# Altium PCB Standalone.PcbDoc
Units mm, origin at the board's own origin, x right, y up, seen from the top; angles counter-clockwise.
Board outline 50 x 50 mm, 2 copper layers (Top Layer, Bottom Layer), stack 1.671 mm thick; 24 components, 27 nets, 89 pads, 12 vias.
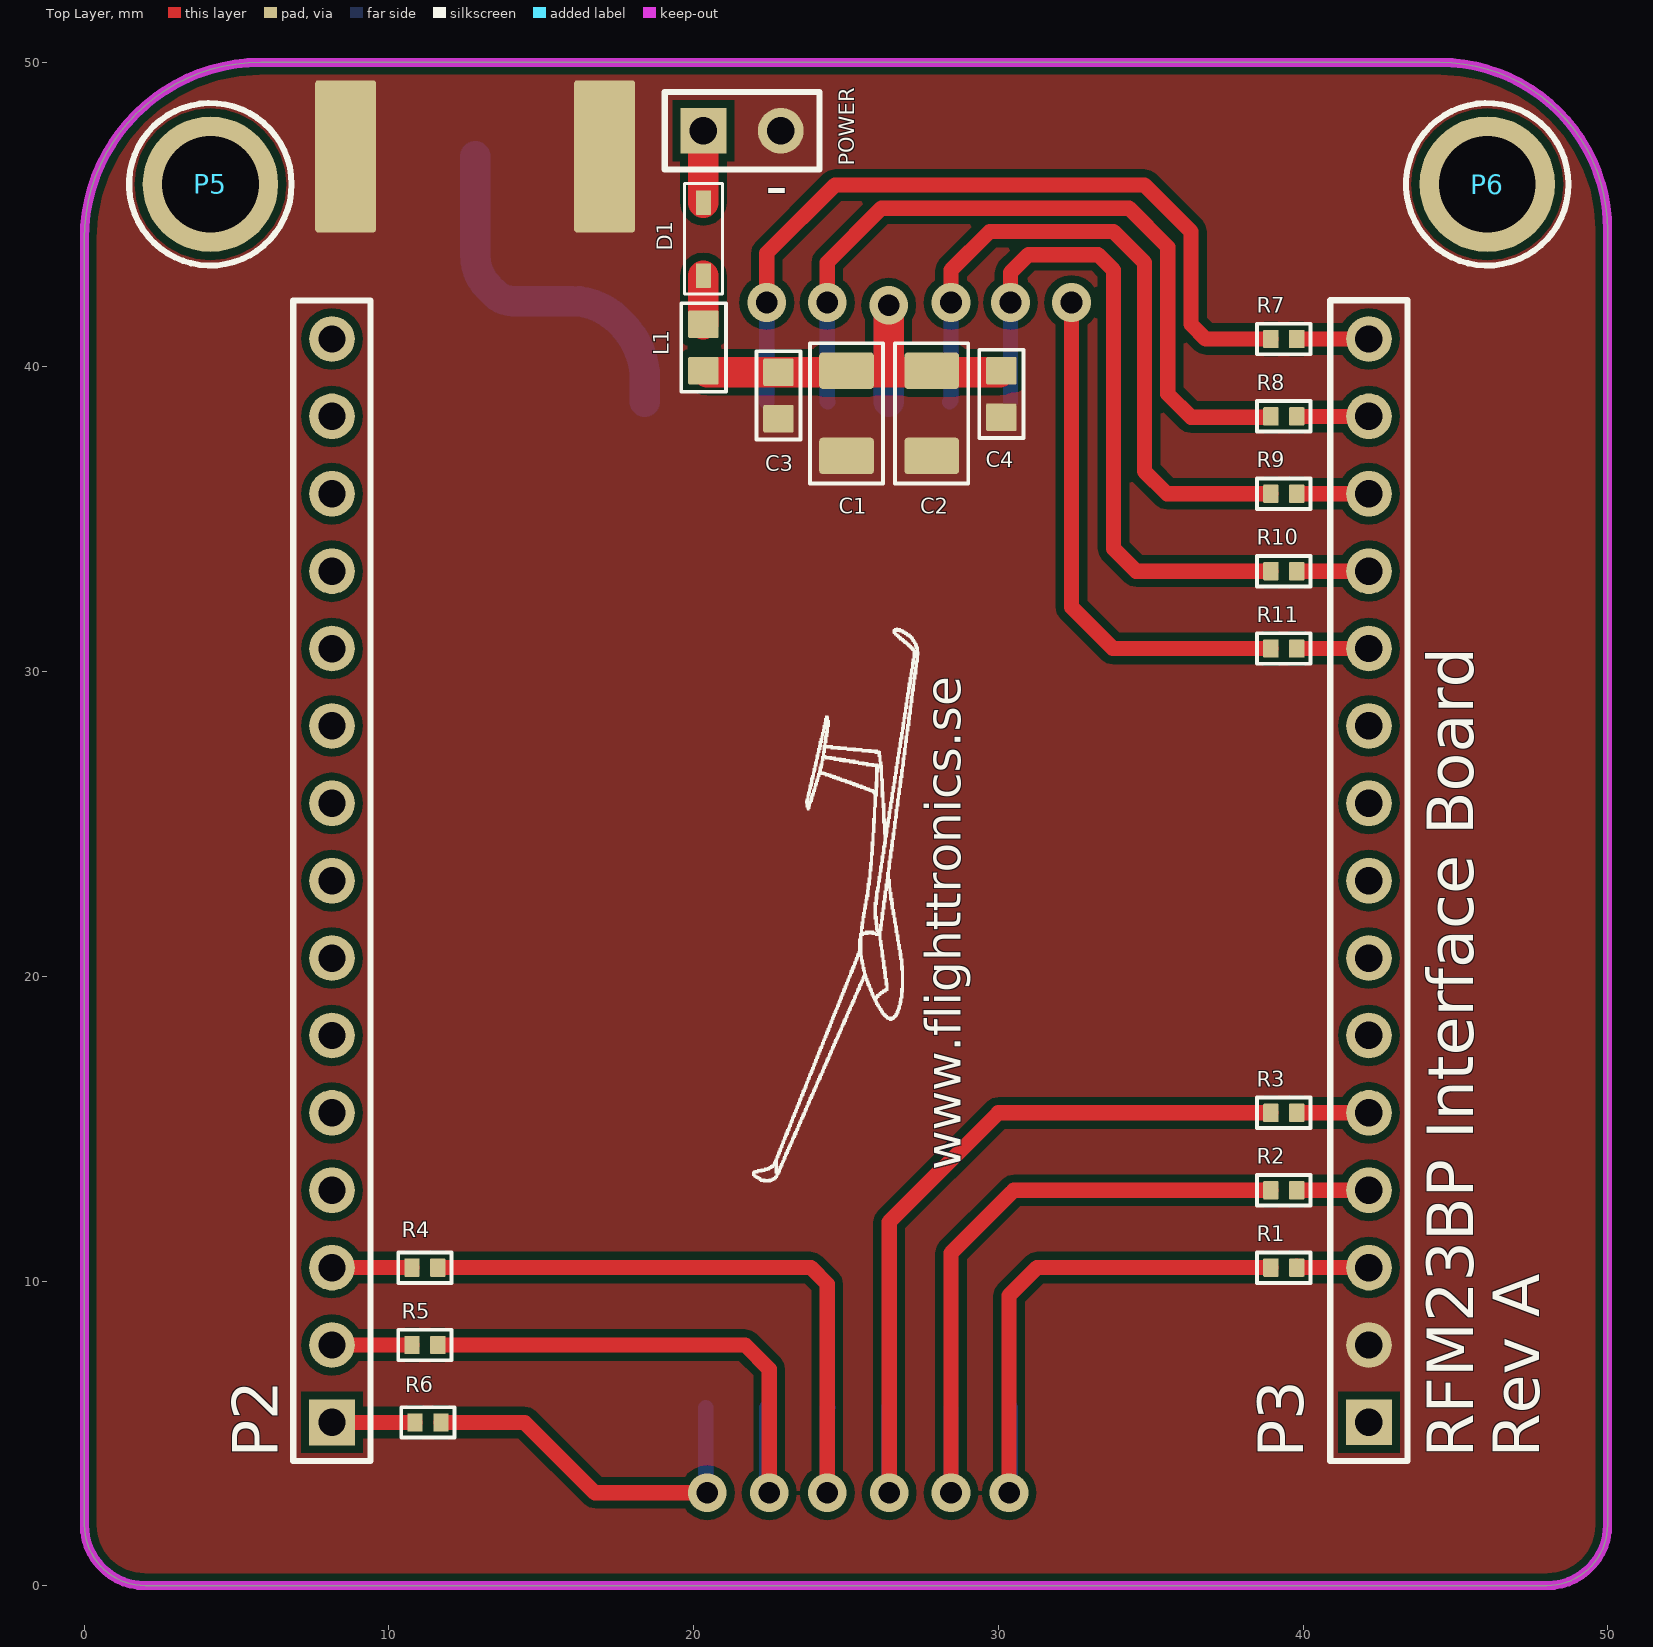
[diagram p0: Top Layer view]
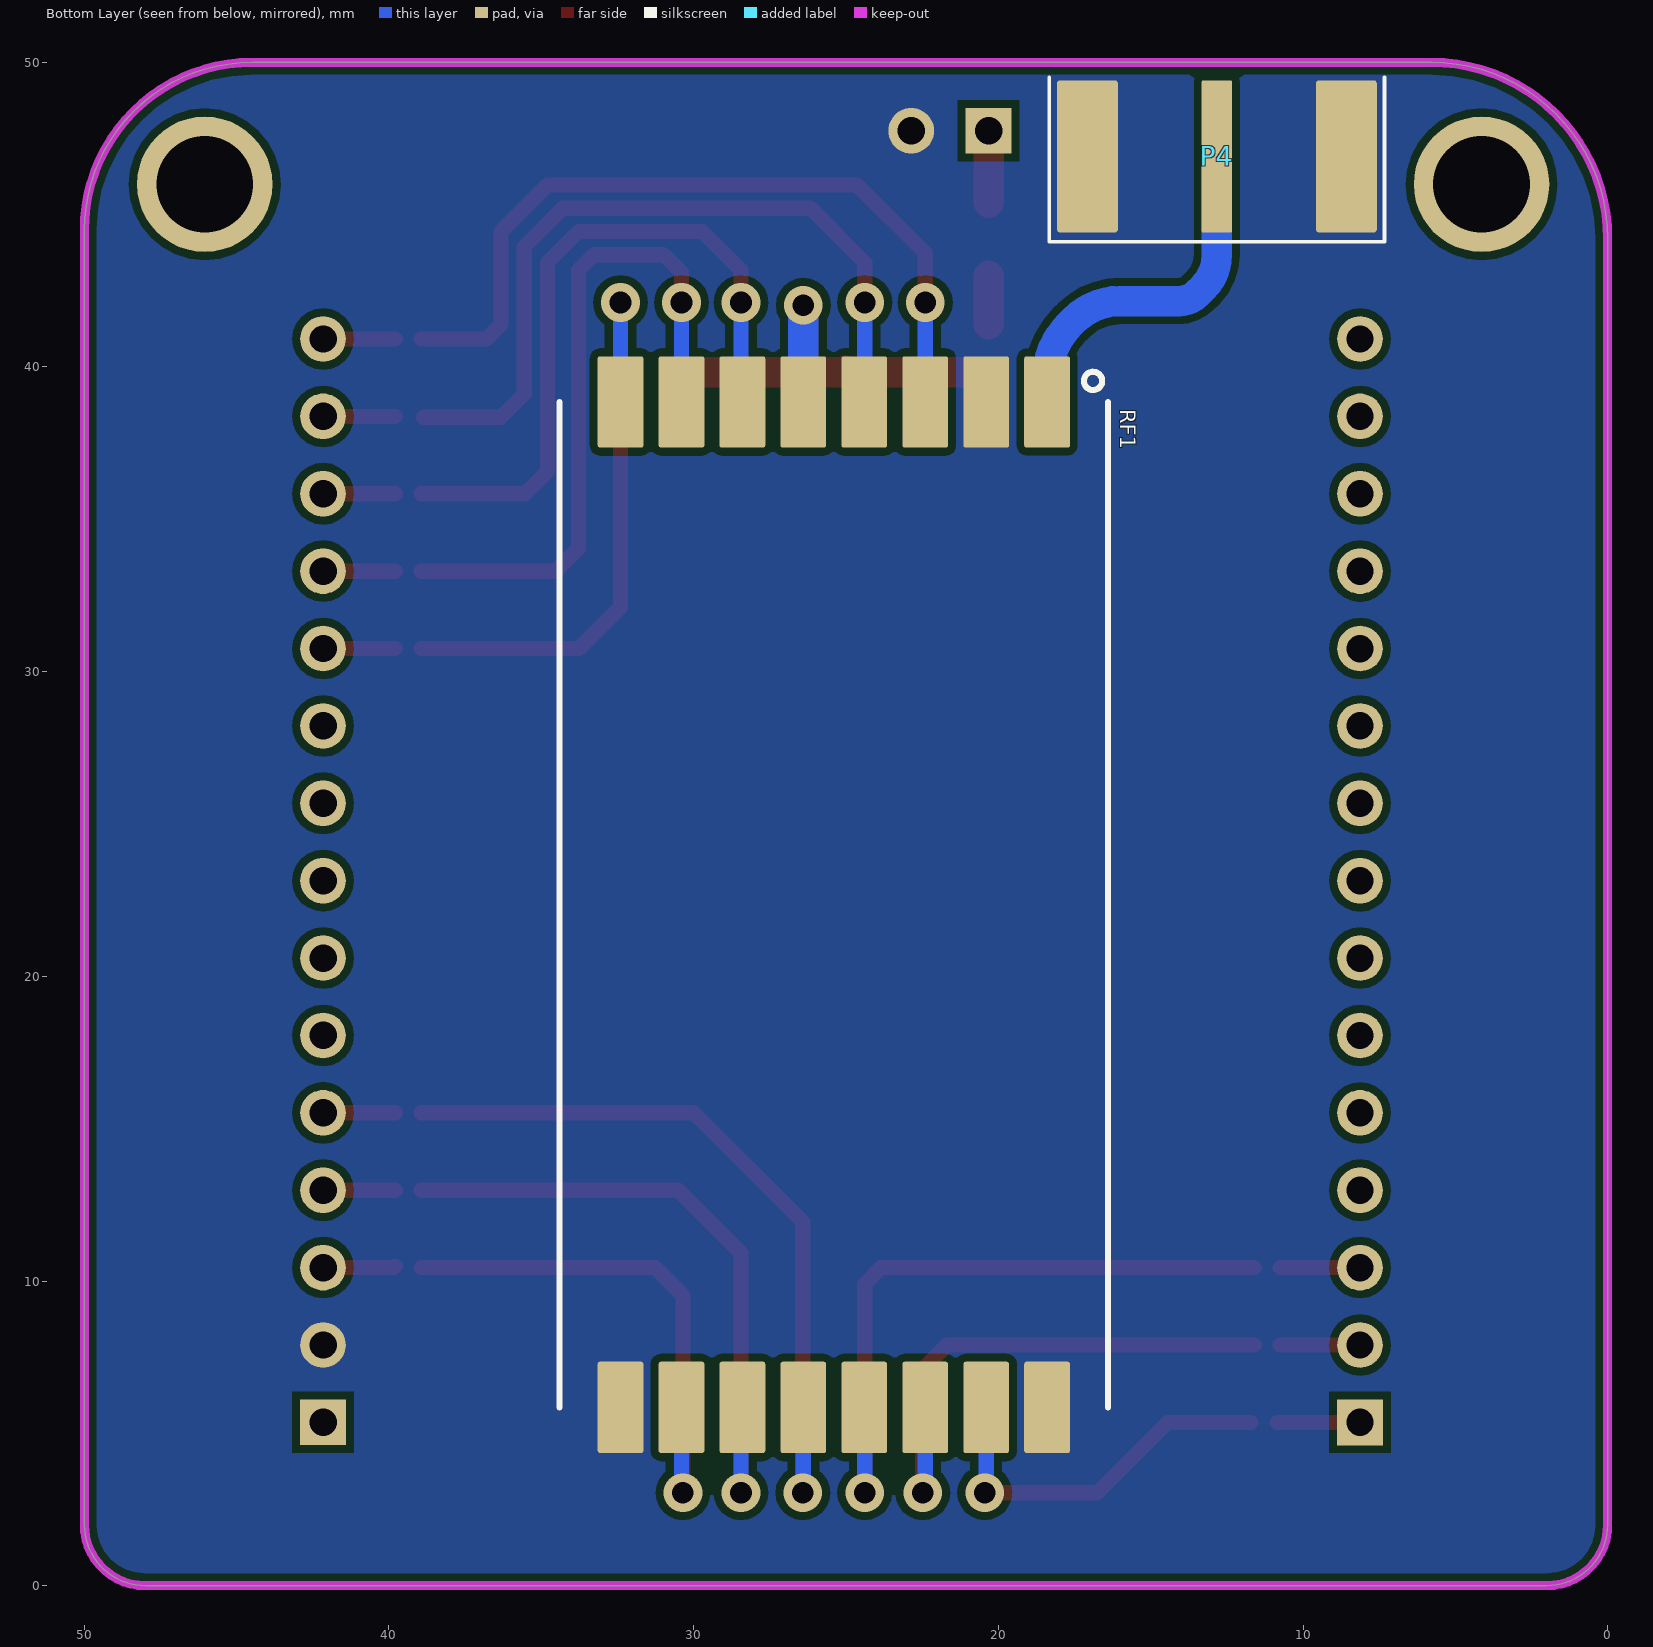
[diagram p1: Bottom Layer view, seen from below]
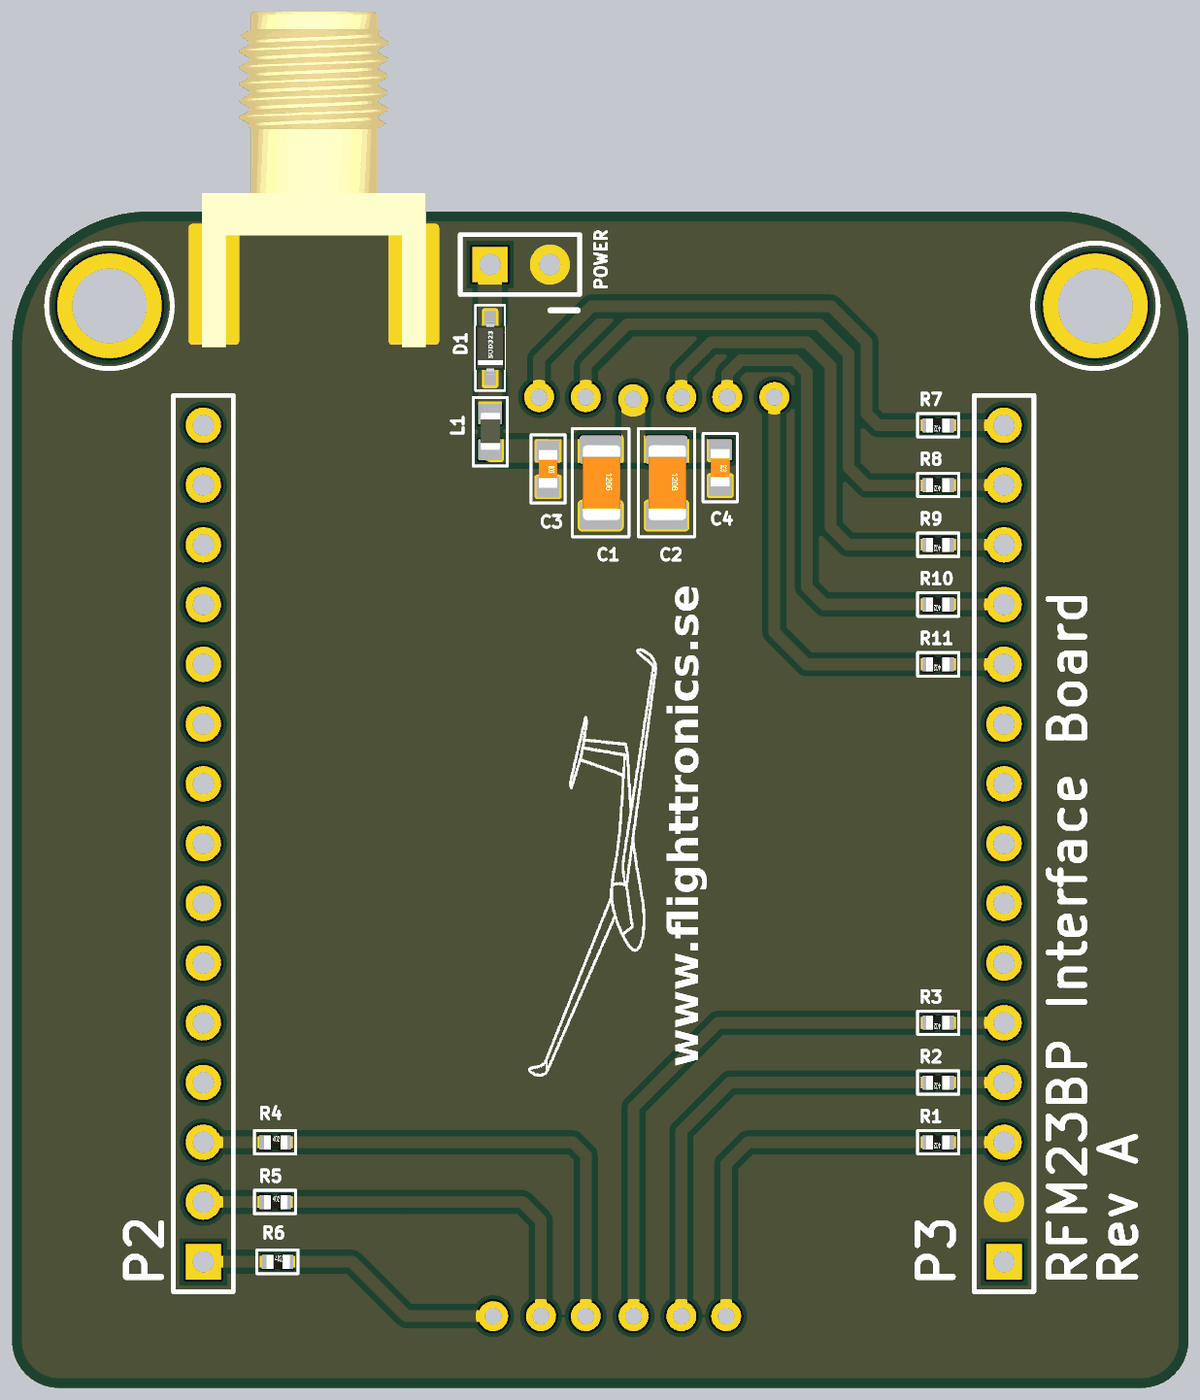
[diagram p2: 3D render of the assembled board from above, using the file's embedded part models]

## Layer stack, top to bottom
Top Layer: signal copper 0.0356
Dielectric: core 1.6, FR-4, Dk 4.8
Bottom Layer: signal copper 0.0356

## Board outline
2,0 cw(c2,2) 0,2 0,44.212 cw(c5.788,44.212) 5.788,50 44.493,50 cw(c44.493,44.493) 50,44.493 50,2 cw(c48,2) 48,0

## Design rules (kind name [scope] priority, off if disabled: settings)
Clearance [All] p1: gap=0.254
HoleSize [All] p1: absolutevalues=TRUE maxlimit=5 minlimit=0.025 maxpercent=80.000 minpercent=20.000
MinimumSolderMaskSliver [All] p1: minsoldermaskwidth=0.125
PlaneConnect PlaneConnect_1 [All] p1: planeconnectstyle=Relief reliefexpansion=0.508 reliefentries=4 reliefconductorwidth=0.254 reliefairgap=0.254
PolygonConnect PolygonConnect_POWER [(InNet('GND') OR InNet('VDD5V0'))] p1: connectstyle=Direct reliefconductorwidth=0.254 reliefentries=4 polygonreliefangle="90 Angle" airgapwidth=0.254
PolygonConnect PolygonConnect_1 [All] p2: connectstyle=Relief reliefconductorwidth=0.4 reliefentries=4 polygonreliefangle="90 Angle" airgapwidth=0.254
RoutingVias [All] p1: holewidth=0.711 width=1.27 viastyle="Through Hole" minholewidth=0.711 minwidth=1.27 maxholewidth=0.711 maxwidth=1.27
SilkToSilkClearance [All] p1: silktosilkclearance=0.2
SilkToSolderMaskClearance [IsPad] p1: minsilkscreentomaskgap=0.125 clearancetoexposedcopper=TRUE
SolderMaskExpansion [All] p1: expansion=0.102
Width [All] p1: maxlimit=1 minlimit=0.254 preferedwidth=0.3 minimp=50.000000 maximp=50.000000 favimp=50.000000
23 further rules are at their usual default settings.

## Classes and differential pairs
component class Standalone: C1 C2 C3 C4 D1 L1 P2 P3 P4 POWER R1 R2 R3 R4 R5 R6 R7 R8 R9 R10 R11 RF1

## Components (designator, comment, footprint, x,y, rotation, side; value= is the part's Value field where it differs from the comment)
C1 "CAP CER 10UF 25V 10% X5R 1206" 1206_CAP 25.019,38.481 r270 top
C2 "CAP CER 10UF 25V 10% X5R 1206" 1206_CAP 27.813,38.481 r270 top
C3 "CAP CER 1UF 16V 10% X7R 0603" 0603_CAP 22.784,39.065 r270 top
C4 "CAP CER 0.1UF 16V 10% X7R 0603" 0603_CAP 30.099,39.116 r270 top
D1 "PMEG2020AEA,115" "SOD323 (SC76)" 20.32,44.196 r90 top
L1 "FERRITE CHIP 180 OHM 2A 0603" 0603 20.32,40.64 r270 top
P2 "Header 15" HDR1X15 8.128,5.359 r90 top
P3 "Header 15" HDR1X15 42.164,5.359 r90 top
P4 "MULTICOMP - 19-70-TGG - JACK SMA, END LAUNCH" "SMA Connector" 12.827,49.911 r270 bottom
P5 "" BEAGLEHOLE 4.138,45.996 r90 top
P6 "" BEAGLEHOLE 46.048,45.996 r90 top
POWER "Header 2" HDR1X2 20.32,47.752 r0 top (schematic designator P1)
R1 "Stackpole Electronics Inc" 0402 39.37,10.439 r180 top
R2 "Stackpole Electronics Inc" 0402 39.37,12.979 r180 top
R3 "Stackpole Electronics Inc" 0402 39.37,15.519 r180 top
R4 "Stackpole Electronics Inc" 0402 11.176,10.439 r0 top
R5 "Stackpole Electronics Inc" 0402 11.176,7.899 r0 top
R6 "Stackpole Electronics Inc" 0402 11.278,5.359 r0 top
R7 "Stackpole Electronics Inc" 0402 39.37,40.919 r180 top
R8 "Stackpole Electronics Inc" 0402 39.37,38.379 r180 top
R9 "Stackpole Electronics Inc" 0402 39.37,35.839 r180 top
R10 "Stackpole Electronics Inc" 0402 39.37,33.299 r180 top
R11 "Stackpole Electronics Inc" 0402 39.37,30.759 r180 top
RF1 "RFM23BP-S2" RFM23BP-S2 25.4,22.352 r270 bottom locked

## Footprints (in the part's own frame and the unit in brackets; to place one, negate y for a bottom-side part, rotate by r counter-clockwise, add the part's x,y. Pads: shape width x height; smd on the part's side, far side on the other; paste and mask are expansions set on the pad)
0402 [mm] "0402"
  rrect10% 0.5x0.6 smd mask+0.075: 1(-0.425,0) 2(0.425,0)
  silkscreen extent -0.87,-0.5 0.87,0.5, body extent -0.47,-0.3 0.53,0.3, height 0.2
0603 [mm]
  rrect10% 0.9x1 smd mask+0.075: 1(-0.762,0) 2(0.762,0)
  silkscreen extent -1.45,-0.72 1.45,0.74, body extent -0.83,-0.41 0.77,0.43, height 0.78
0603_CAP [mm]
  rrect10% 0.9x1 smd mask+0.075: 1(-0.762,0) 2(0.762,0)
  silkscreen extent -1.45,-0.72 1.45,0.72, body extent -0.8,-0.4 0.8,0.4, height 0.3
1206_CAP [mm]
  rrect20% 1.2x1.8 smd mask+0.075: 1(-1.4,0) 2(1.4,0)
  silkscreen extent -2.3,-1.2 2.3,1.2, body extent -1.6,-0.76 1.6,0.84, height 1
BEAGLEHOLE [mm]
  round 4.445 hole 3.175: 1(0,0)
  silkscreen extent -2.67,-2.67 2.67,2.66
HDR1X2 [mm] "Connector; Header; 2 Position"
  rect 1.5x1.5 hole 0.9: 1(0,0)
  round 1.5 hole 0.9: 2(2.54,0)
  silkscreen extent -1.27,-1.27 3.81,1.27
HDR1X15 [mm] "Connector; Header; 15 Position"
  rect 1.5x1.5 hole 0.9: 1(0,0)
  round 1.5 hole 0.9: 2(2.54,0) 3(5.08,0) 4(7.62,0) 5(10.16,0) 6(12.7,0) 7(15.24,0) 8(17.78,0) 9(20.32,0) 10(22.86,0) 11(25.4,0) 12(27.94,0) 13(30.48,0) 14(33.02,0) 15(35.56,0)
  silkscreen extent -1.27,-1.27 36.83,1.27
RFM23BP-S2 [mm] "RFM23BP-S2"
  rrect10% 3x1.5 smd mask+0.075: 1(-16.5,7) 2(-16.5,5) 3(-16.5,3) 4(-16.5,1) 5(-16.5,-1) 6(-16.5,-3) 7(-16.5,-5) 8(-16.5,-7) 9(16.5,-7) 10(16.5,-5) 11(16.5,-3) 12(16.5,-1) 13(16.5,1) 14(16.5,3) 15(16.5,5) 16(16.5,7)
  silkscreen extent -17.49,-9 16.5,9, body extent -16.5,-9 16.5,9, height 1.9
"SMA Connector" [mm]
  rrect10% 5x1 smd paste-100 mask+0.075: 1(3,0)
  rrect10% 5x2 smd far side paste-100 mask+0.075: 2(3,4.25) 3(3,-4.25)
  rrect10% 5x2 smd paste-100 mask+0.075: 2(3,4.25) 3(3,-4.25)
  silkscreen extent 0.4,-5.5 5.8,5.5, body extent -8.6,-4.76 5.67,4.76, height 4.35
"SOD323 (SC76)" [mm]
  rrect10% 0.8x0.5 smd mask+0.1: 1(-1.2,0) 2(1.2,0)
  silkscreen extent -1.8,-0.63 1.83,0.63, body extent -1.23,-0.64 1.27,0.62, height 0.9

## Part data
C1 C2: library part GRM31CR61E106KA12L
C3: library part C0603C105K4RACTU
C4: library part C0603C104K4RACTU
D1: "SCHOTTKY RECT 20V 2A SOD323"
L1: library part MPZ1608S181A
P2 P3: "CONN HEADER FEMALE 15POS.1\" TIN"
P4: library part 19-70-TGG
P5 P6: library part Plug, "PCB HOLE (NO COMPONENT)"
POWER: "Header, 2-Pin"
R1 R2 R3 R4 R5 R6 R7 R8 R9 R10 R11: library part RMCF0402FT100R, "RES 100 OHM 1/16W 1% 0402 SMD"
RF1: "UHF 1W Transceiver"

## Via types
v1: diameter 1.27, hole 0.711, Top Layer to Bottom Layer, 12 vias

## Nets (pads, with @x,y where several pads share a name; then routed paths per layer and width w, separated by ;. In a path a pad name is that pad's centre, name@x,y a point inside that pad or via, vN(x,y) a via of type N, cw(c..) or ccw(c..) an arc to the next point about the centre after c; other vN are vias at no path point)
G0: P3.13 R9.1 | length 2.4
  Top Layer w0.5: R9.1 P3.13
G1: P3.12 R10.1 | length 2.4
  Top Layer w0.5: R10.1 P3.12
G2: P3.11 R11.1 | length 2.4
  Top Layer w0.5: R11.1 P3.11
GND: C1.2 C2.2 C3.2 C4.2 P3.2 P4.2 P4.3 POWER.2 RF1.2 RF1.9 RF1.16
NetD1_1: D1.1 L1.1 | length 1.6
  Top Layer w1: L1.1 D1.1
NetD1_2: D1.2 POWER.1 | length 2.4
  Top Layer w1: D1.2 POWER.1
NetP4_1: P4.1 RF1.1 | length 11.9
  Bottom Layer w1: P4.1 12.827,43.688 ccw(c14.36,43.688) 13.276,42.604 13.462,42.418 ccw(c14.075,43.031) 14.075,42.164 16.002,42.164 cw(c16.002,40.018) 17.52,41.535 17.656,41.399 cw(c15.86,39.603) 18.4,39.603 RF1.1
NetR1_2: R1.2 RF1.10 | length 18.1
  Top Layer w0.5: v1@30.353,3.175 30.353,9.525 31.267,10.439 R1.2
  Bottom Layer w0.4: v1@30.353,3.175 v1@30.4,3.128
  Bottom Layer w0.5: v1@30.4,3.128 RF1.10
  other v1: 30.353,3.048
NetR2_2: R2.2 RF1.11 | length 22
  Top Layer w0.5: v1(28.448,3.048) 28.448,10.922 30.378,12.852 30.505,12.979 R2.2
  Bottom Layer w0.4: RF1.11 RF1.11@28.448,5.804
  Bottom Layer w0.5: v1(28.448,3.048) RF1.11@28.448,5.804
NetR3_2: R3.2 RF1.12 | length 25.7
  Top Layer w0.5: v1(26.416,3.048) 26.416,11.938 29.997,15.519 R3.2
  Bottom Layer w0.4: v1@26.4,3.064 v1(26.416,3.048)
  Bottom Layer w0.5: v1@26.4,3.064 RF1.12
NetR4_2: R4.2 RF1.13 | length 22.7
  Top Layer w0.5: R4.2 23.851,10.439 24.384,9.906 v1(24.384,3.048)
  Bottom Layer w0.5: v1(24.384,3.048) 24.384,5.836 RF1.13
NetR5_2: R5.2 RF1.14 | length 18.1
  Top Layer w0.5: R5.2 21.692,7.899 22.479,7.112 v1(22.479,3.048)
  Bottom Layer w0.5: RF1.14 22.4,3.127 v1(22.479,3.048)
NetR6_2: R6.2 RF1.15 | length 12.5
  Top Layer w0.5: R6.2 14.453,5.359 16.764,3.048 v1(20.447,3.048)
  Bottom Layer w0.5: RF1.15 20.4,3.095 v1(20.447,3.048)
NetR7_2: R7.2 RF1.3 | length 26.2
  Top Layer w0.5: v1(22.4,42.116) 22.4,43.736 24.638,45.974 34.798,45.974 36.322,44.45 36.322,41.402 36.805,40.919 R7.2
  Bottom Layer w0.5: RF1.3 v1(22.4,42.116)
NetR8_2: R8.2 RF1.4 | length 25.5
  Top Layer w0.5: v1(24.384,42.116) 24.384,43.434 26.162,45.212 34.29,45.212 35.56,43.942 35.56,39.116 36.322,38.354 R8.2@38.862,38.354
  Bottom Layer w0.5: v1(24.384,42.116) 24.384,38.868 RF1.4 ; v1@24.4,42.116 v1@24.4,42.148
NetR9_2: R9.2 RF1.6 | length 23
  Top Layer w0.5: v1(28.448,42.116) 28.448,43.18 29.718,44.45 33.782,44.45 34.798,43.434 34.798,36.576 35.535,35.839 R9.2
  Bottom Layer w0.5: RF1.6 28.448,38.9 v1(28.448,42.116)
NetR10_2: R10.2 RF1.7 | length 22.7
  Top Layer w0.5: v1(30.4,42.116) 30.4,43.1 30.988,43.688 33.274,43.688 33.782,43.18 33.782,34.036 34.519,33.299 R10.2
  Bottom Layer w0.5: RF1.7 v1(30.4,42.116)
NetR11_2: R11.2 RF1.8 | length 20.4
  Top Layer w0.5: v1(32.4,42.116) 32.4,32.116 33.757,30.759 R11.2
  Bottom Layer w0.5: RF1.8 v1(32.4,42.116)
NIRQ: P2.2 R5.1 | length 2.6
  Top Layer w0.5: P2.2 R5.1
NSEL: P2.3 R4.1 | length 2.6
  Top Layer w0.5: P2.3 R4.1
RX: P3.14 R8.1 | length 2.4
  Top Layer w0.5: R8.1 P3.14
SCK: P3.5 R3.1 | length 2.4
  Top Layer w0.5: R3.1@39.795,15.519 P3.5
SDI: P3.4 R2.1 | length 2.4
  Top Layer w0.5: R2.1@39.795,12.979 P3.4
SDN: P2.1 R6.1 | length 2.7
  Top Layer w0.5: P2.1 R6.1
SDO: P3.3 R1.1 | length 2.4
  Top Layer w0.5: R1.1@39.795,10.49 39.846,10.439 P3.3
TX: P3.15 R7.1 | length 2.4
  Top Layer w0.5: R7.1 P3.15
VDD5V0: C1.1 C2.1 C3.1 C4.1 L1.2 RF1.5 | length 15
  Top Layer w1: L1.2@20.443,39.827 C3.1 24.965,39.827 C1.1 ; C1.1@25.019,39.827 26.467,39.827 ; v1(26.4,42.028) 26.4,39.988 ccw(c26.628,39.988) 26.467,39.827 ; C4.1@30.048,39.827 26.467,39.827
  Bottom Layer w1: RF1.5 v1(26.4,42.028)
pads on no net: P2.4 P2.5 P2.6 P2.7 P2.8 P2.9 P2.10 P2.11 P2.12 P2.13 P2.14 P2.15 P3.1 P3.6 P3.7 P3.8 P3.9 P3.10 P5.1 P6.1

## Polygon pours and split planes (outlines as drawn)
GND on Bottom Layer "Top Layer-No Net1" (solid, pour order 7): 2,0 cw(c2,2) 0,2 0,44.212 cw(c5.788,44.212) 5.788,50 44.493,50 cw(c44.493,44.493) 50,44.493 50,2 cw(c48,2) 48,0
GND on Top Layer "Top Layer-No Net" (solid, remove dead copper, pour order 5): 2,0 cw(c2,2) 0,2 0,44.212 cw(c5.788,44.212) 5.788,50 44.493,50 cw(c44.493,44.493) 50,44.493 50,2 cw(c48,2) 48,0

## Keep-outs
Keep-Out Layer:
  the board outline again, w0.3

## Silkscreen, mask and mechanical layers (free items; w line width, h text height)
Top Overlay:
  drawing of 834 lines, arcs and shapes, not listed
  text "-" at 22.352,45.212 h1.52
  text "www.flighttronics.se" at 29.159,13.64 h2 r90
  text "RFM23BP Interface Board" at 45.593,4.191 h1.52 r90
  text "Rev A" at 47.752,4.191 h1.52 r90
Mechanical 1:
  the board outline again, w0.025
Mechanical 2:
  lines w0.254: -4.699,1.524 -4.191,0 ; -4.699,48.476 -4.191,50 ; -4.445,0 -3.937,0 ; -4.445,50 -3.937,50 ; -4.191,19.896 -4.191,0 ; -4.191,30.104 -4.191,50 ; -3.683,1.524 -4.191,0 ; -3.683,48.476 -4.191,50 ; 0.16,-3.264 0.16,-2.756 ; 1.684,-3.518 0.16,-3.01 ; 1.684,-2.502 0.16,-3.01 ; 20.056,-3.01 0.16,-3.01 ; 30.264,-3.01 50.16,-3.01 ; 48.636,-3.518 50.16,-3.01 ; 48.636,-2.502 50.16,-3.01 ; 50.16,-3.264 50.16,-2.756
  text "50 (mm)" at -3.277,20.15 h1.52 r90
  text "50 (mm)" at 20.31,-3.924 h1.52